# EAGLE board VI Curve Stand Alone Portable (EAGLE 5.11)
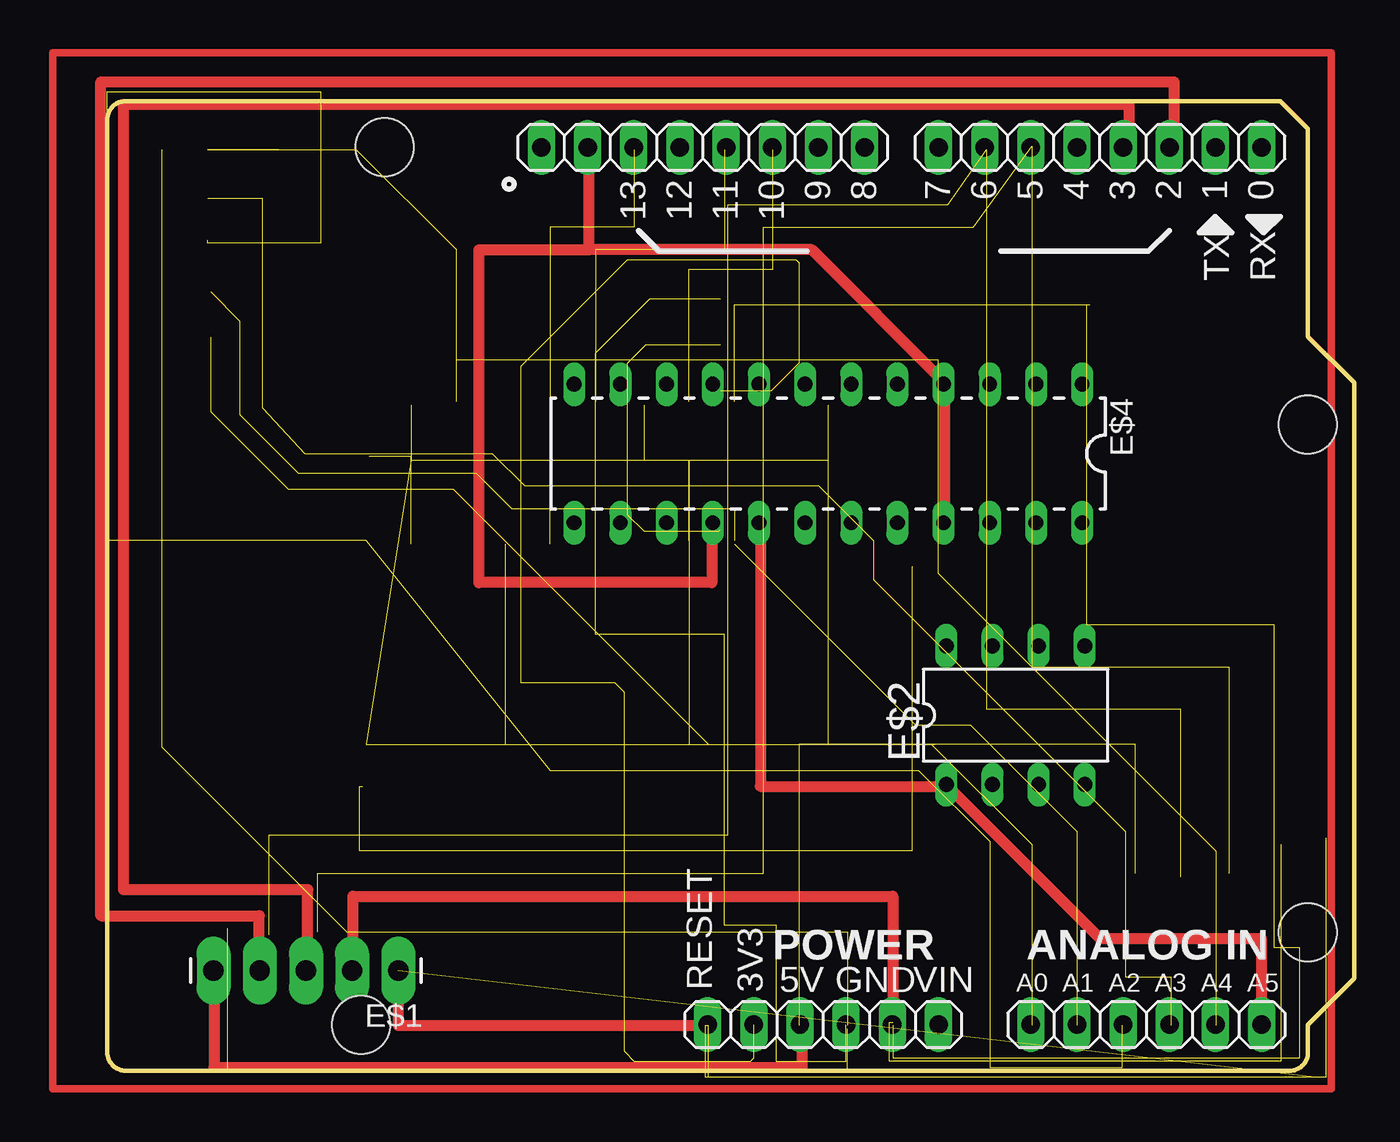
[diagram p0: board, top side]
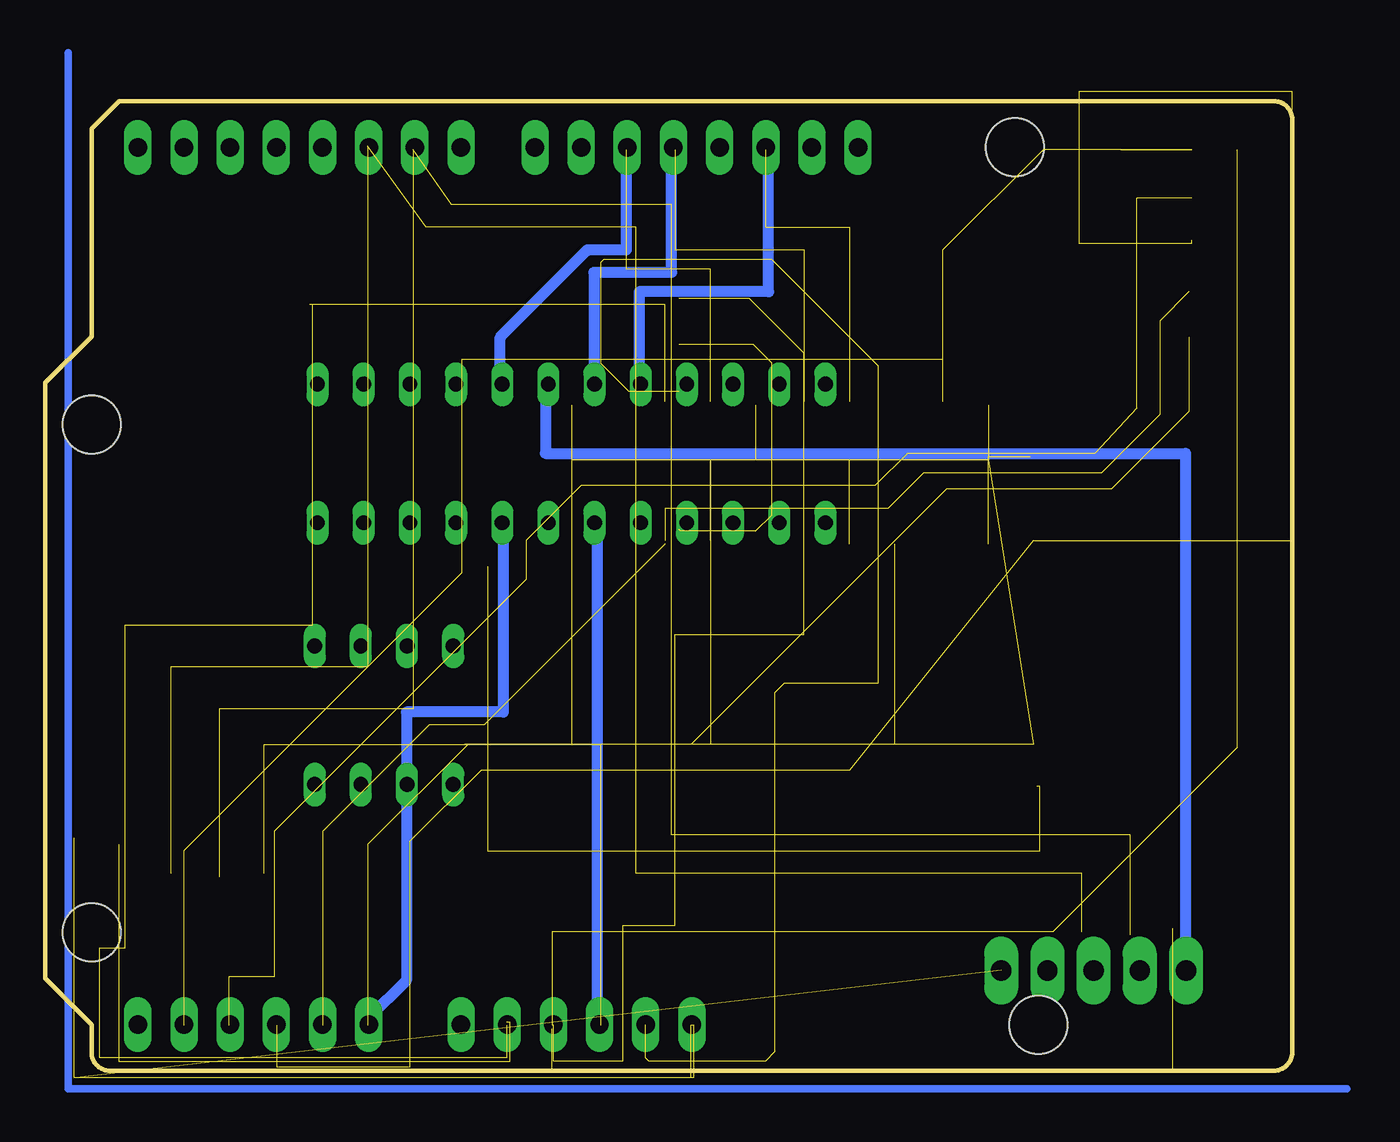
[diagram p1: board, bottom side, seen from below]

Size 68.58 x 53.34 mm. Coordinates in mm from the lower left corner, seen from the top.
Outline: 64.52,53.34 66.04,51.82 66.04,40.39 68.58,37.85 68.58,5.08 66.04,2.54 66.04,1 arc-90 65.04,0 1,0 arc-90 0,1 0,52.34 arc-90 1,53.34 64.52,53.34
Copper layers (1*16): Top 0.035mm / dielectric 1.5mm / Bottom 0.035mm
Design rules "ArduinoDEF": minimum track width 6mil, minimum drill 12mil, track to track 6mil, track to pad 6mil, pad to pad 6mil, via to via 6mil, smd to smd 6mil, copper to edge 20mil, drill to drill 6mil, minimum pad ring 8mil, minimum via ring 8mil, stop-mask expansion 0mil, vias tented up to drill 0mil, thermal gap 10mil
Net classes: 0 default: width 0.254 mm, clearance 0.254 mm; 1 power: width 0.61 mm, drill 0.61 mm, clearance 0.254 mm; 2 gnd: width 0.305 mm, drill 0.559 mm, clearance 0.254 mm; 3 usbvcc: width 0.508 mm, drill 0.61 mm, clearance 0.254 mm; 4 aref: width 0.406 mm, drill 0.61 mm, clearance 0.254 mm
Holes 3.2 mm at 66.04,35.56 66.04,7.62 15.24,50.8 13.97,2.54
vRestrict: area 22.9,44.1 to 24.6,49.1; area 25.4,45.5 to 27.1,49.1; area 28.4,45.3 to 29.6,48.8; area 31,45.3 to 32.1,48.8; area 33.5,45.3 to 34.7,48.8; area 36.1,45.3 to 37.2,48.8; area 38.7,47.2 to 39.9,48.8; area 40.3,45.1 to 47.6,46.9; area 60.3,44.2 to 61.7,46.7; area 62.9,44.2 to 64.3,46.7; area 61.3,35.8 to 64.8,37.2; area 0.6,21.8 to 2,30.1; 14 more areas

## Footprints (pad centres in the part's own frame; a part is rotated, then mirrored left to right if it is on the bottom)
1X06 = drill 1.016 long: 1 -6.35,0; 2 -3.81,0; 3 -1.27,0; 4 1.27,0; 5 3.81,0; 6 6.35,0
1X05_LONGPADS = drill 1.118 pad 1.88 long: 1 0,0; 2 2.54,0; 3 5.08,0; 4 7.62,0; 5 10.16,0
DIL8 = drill 0.813 long: 1 -3.81,-3.81; 2 -1.27,-3.81; 3 1.27,-3.81; 4 3.81,-3.81; 5 3.81,3.81; 6 1.27,3.81; 7 -1.27,3.81; 8 -3.81,3.81
DIL24 = drill 0.813 long: 1 -13.97,-3.81; 2 -11.43,-3.81; 3 -8.89,-3.81; 4 -6.35,-3.81; 5 -3.81,-3.81; 6 -1.27,-3.81; 7 1.27,-3.81; 8 3.81,-3.81; 9 6.35,-3.81; 10 8.89,-3.81; 11 11.43,-3.81; 12 13.97,-3.81; 13 13.97,3.81; 14 11.43,3.81; 15 8.89,3.81; 16 6.35,3.81; 17 3.81,3.81; 18 1.27,3.81; 19 -1.27,3.81; 20 -3.81,3.81; 21 -6.35,3.81; 22 -8.89,3.81; 23 -11.43,3.81; 24 -13.97,3.81
1X08 = drill 1.016 long: 1 -8.89,0; 2 -6.35,0; 3 -3.81,0; 4 -1.27,0; 5 1.27,0; 6 3.81,0; 7 6.35,0; 8 8.89,0

## Placement (x,y rotation side)
AD  [1X06]  57.15,2.54 0 top
E$1  [1X05_LONGPADS]  16,5.51 180 top
E$2  [DIL8]  49.96,19.56 0 top
E$4  [DIL24]  39.65,33.96 180 top
IOH  [1X08]  32.77,50.8 180 top
IOL  [1X08]  54.61,50.8 180 top
POWER  [1X06]  39.37,2.54 0 top

## Library data of the parts
AD IOH IOL POWER = pinhead
E$1 E$4 = SparkFun
E$2 = microchip

## Nets
N$6: POWER.4
N$7: POWER.2
N$8: IOL.1
N$9: IOL.2
N$10: POWER.5
N$11: AD.1
N$13: AD.2
N$14: AD.3
N$16: AD.4
N$17: AD.5
S$6: E$1.1

## Tracks (layer width: path | path; a pad name or v marks a point on that pad's centre or on a via)
N$1  (6 unrouted)
N$6  (9 unrouted)
N$7  (14 unrouted)
S$1  (8 unrouted)
S$2  (8 unrouted)
S$3  (3 unrouted)
S$4  (4 unrouted)
S$5  (4 unrouted)
S$6  (3 unrouted)
  Top 0.61: E$1.1 16,2.49 33.43,2.49
S$7  (1 unrouted)
S$8  (21 unrouted)
S$9  (3 unrouted)
S$10  (3 unrouted)
S$11  (3 unrouted)
S$12  (7 unrouted)
S$13  (9 unrouted)
S$14  (4 unrouted)
S$15  (7 unrouted)
S$16  (12 unrouted)
S$17  (5 unrouted)
S$18  (8 unrouted)
S$19  (1 unrouted)
S$20  (4 unrouted)
S$21  (2 unrouted)
S$22  (1 unrouted)
S$23  (2 unrouted)
S$24
  Top 0.61: 43.2,2.49 43.2,9.6 13.51,9.6 13.51,5.51
S$25  (1 unrouted)
S$26  (13 unrouted)
S$27  (1 unrouted)
S$28  (5 unrouted)
S$29
  Bottom 0.61: 48.72,15.47 48.72,4.98 50.85,2.85
S$30
  Top 0.61: 38.23,2.85 38.23,0.18 11.56,0.18 11.02,0.18 5.87,0.18 5.87,5.33
S$31
  Top 0.61: 11.02,5.51 11.02,9.96 0.89,9.96 0.89,53.16 56.19,53.16 56.19,50.67
S$32
  Top 0.61: 8.36,5.33 8.36,8.53 -0.36,8.53 -0.36,54.41 58.67,54.41 58.67,50.85 58.32,50.85
S$33  (4 unrouted)
S$34
  Top 0.61: 46.05,37.69 46.05,30.05
S$35
  Bottom 0.61: 43.56,37.69 43.56,40.36 38.76,45.16 36.63,45.16 36.63,50.85
S$36
  Bottom 0.61: 41.07,37.69 41.07,33.96 5.87,33.96 5.87,5.33
S$37
  Bottom 0.61: 34.14,50.85 34.14,43.92 36.8,43.92 37.34,43.92 37.69,43.92 38.05,43.92 38.41,43.92 38.41,37.69
S$38
  Bottom 0.61: 28.8,50.85 28.8,42.85 35.92,42.85 35.92,37.69
S$39
  Bottom 0.61: 38.58,30.05 38.23,30.05 38.23,2.31
S$40
  Top 0.61: 33.25,30.05 33.25,26.85 20.45,26.85 20.45,45.16 26.49,45.16 | 46.05,37.87 38.76,45.16 26.49,45.16 | 26.49,45.16 26.49,50.85
S$41
  Top 0.61: 35.92,30.05 35.92,15.65 46.41,15.65
S$42
  Bottom 0.61: 48.72,15.82 48.72,19.74 43.38,19.74 43.38,30.05 43.56,30.05
S$43
  Top 0.61: 46.41,15.47 54.59,7.29 63.48,7.29 63.48,2.49 63.65,2.49
S$70
  Top 0.406: -3,-1 67.33,-1 67.33,56 -3,56 -3,-1
S$71
  Bottom 0.406: -3,-1 67.33,-1 67.33,56

## Text on the board
tPlace: 13 | 12 | 11 | 10 | 9 | 8 | 7 | 6 | 5 | 4 | 3 | 2 | 1 | 0
tNames: TX | RX | ANALOG IN | RESET | 3V3 | 5V | GND | VIN | A0 | A1 | A2 | A3 | A4 | A5
ReferenceLC: L | TX | RX | PC1 | PC2
214bmp: D:/SmartProjects/Snc/a4_bn_logo2.bmp